# Altium PCB PCB1v2.PcbDoc
Units mil, origin at the board's own origin, x right, y up, seen from the top; angles counter-clockwise.
Board outline 1405 x 1775 mil, 2 copper layers (Top Layer, Bottom Layer); 27 components, 16 nets, 101 pads, 82 vias.
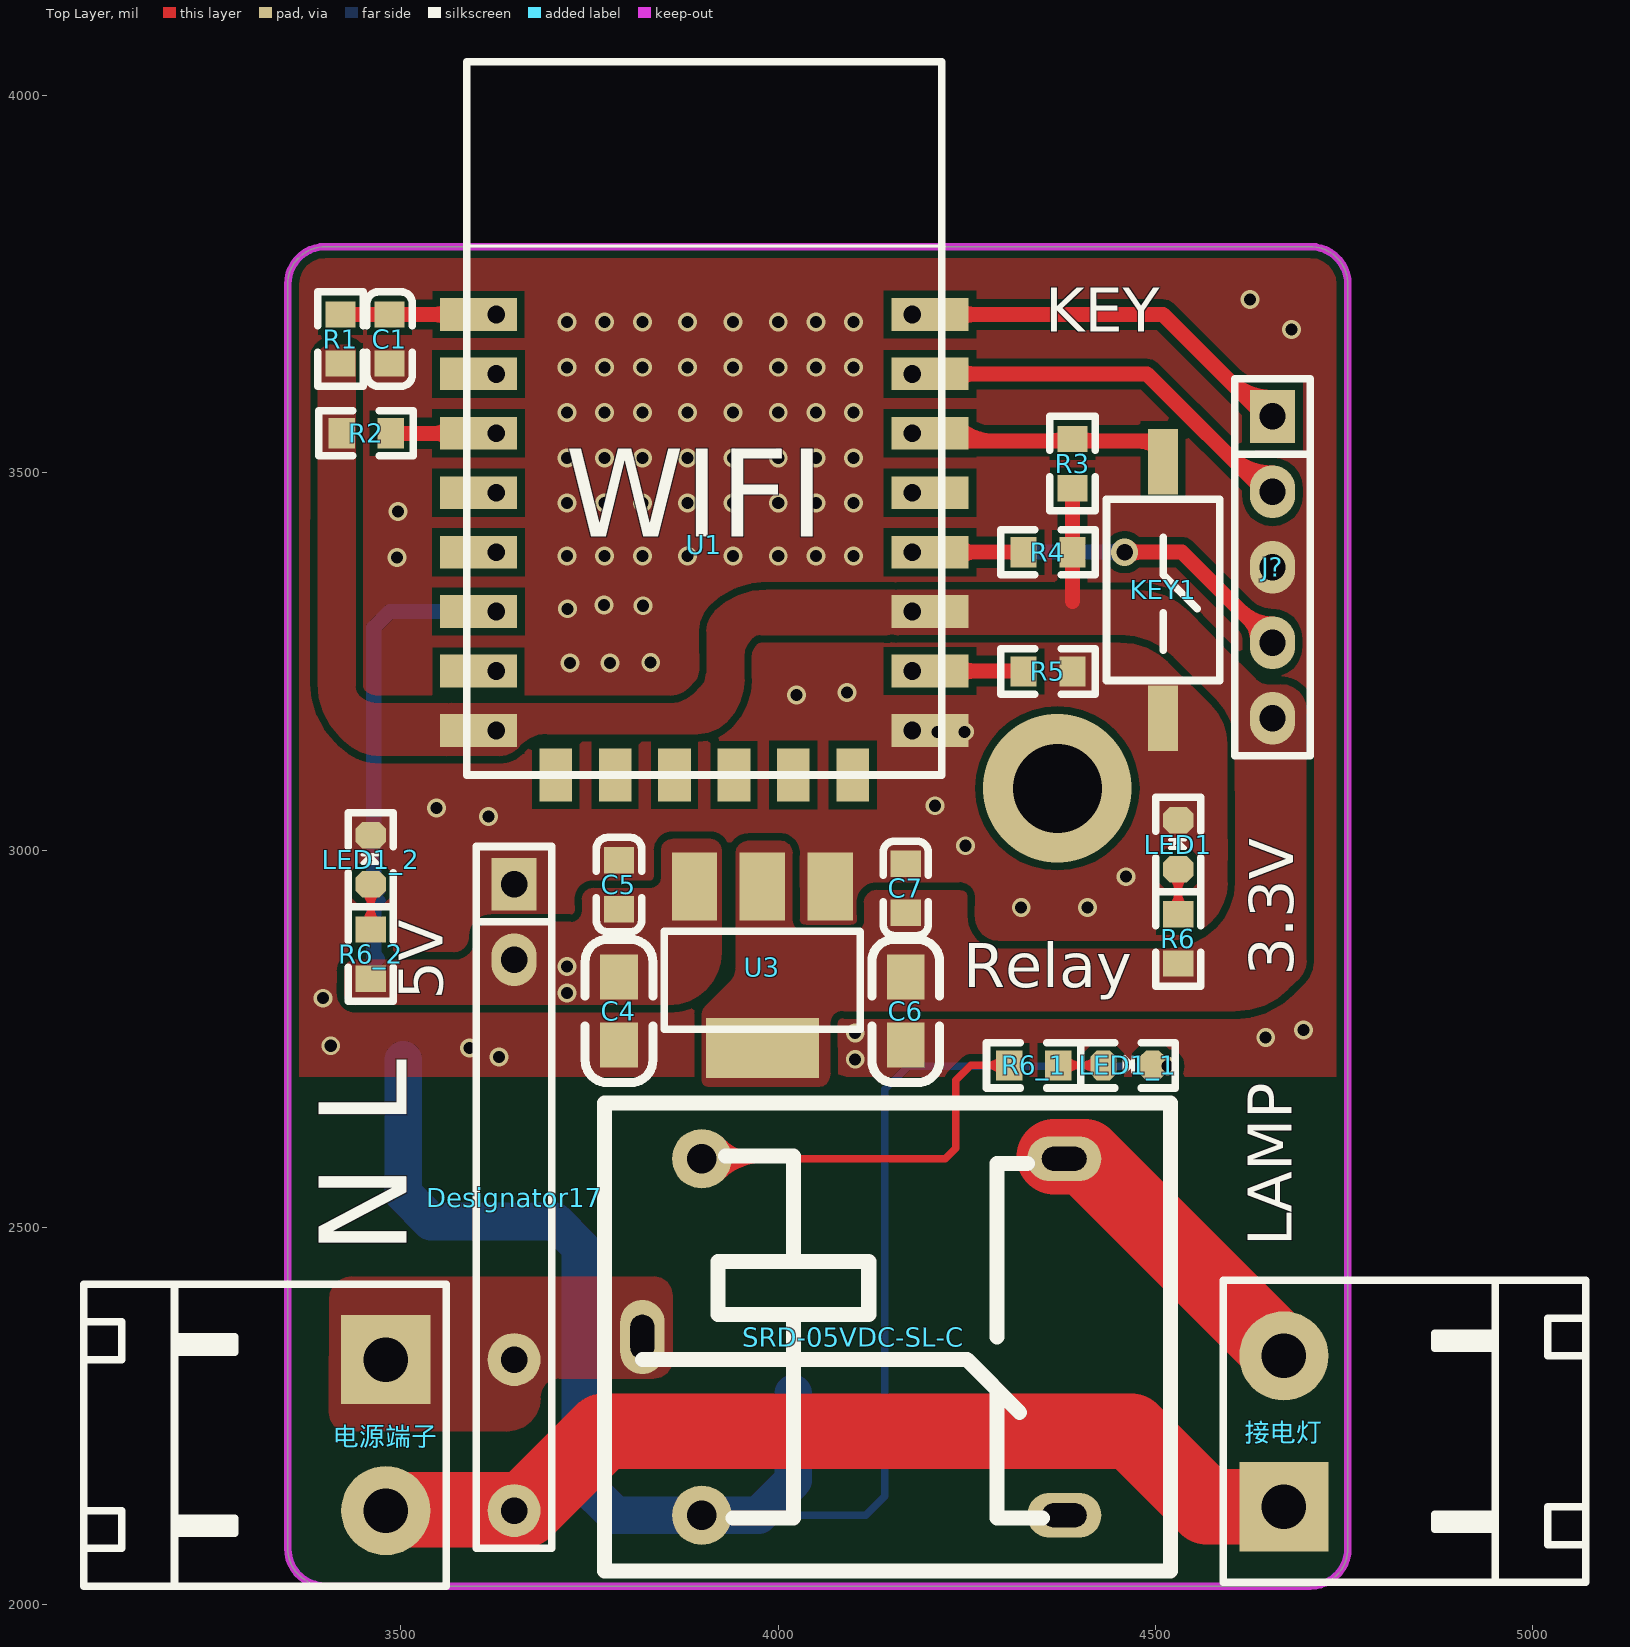
[diagram p0: Top Layer view]
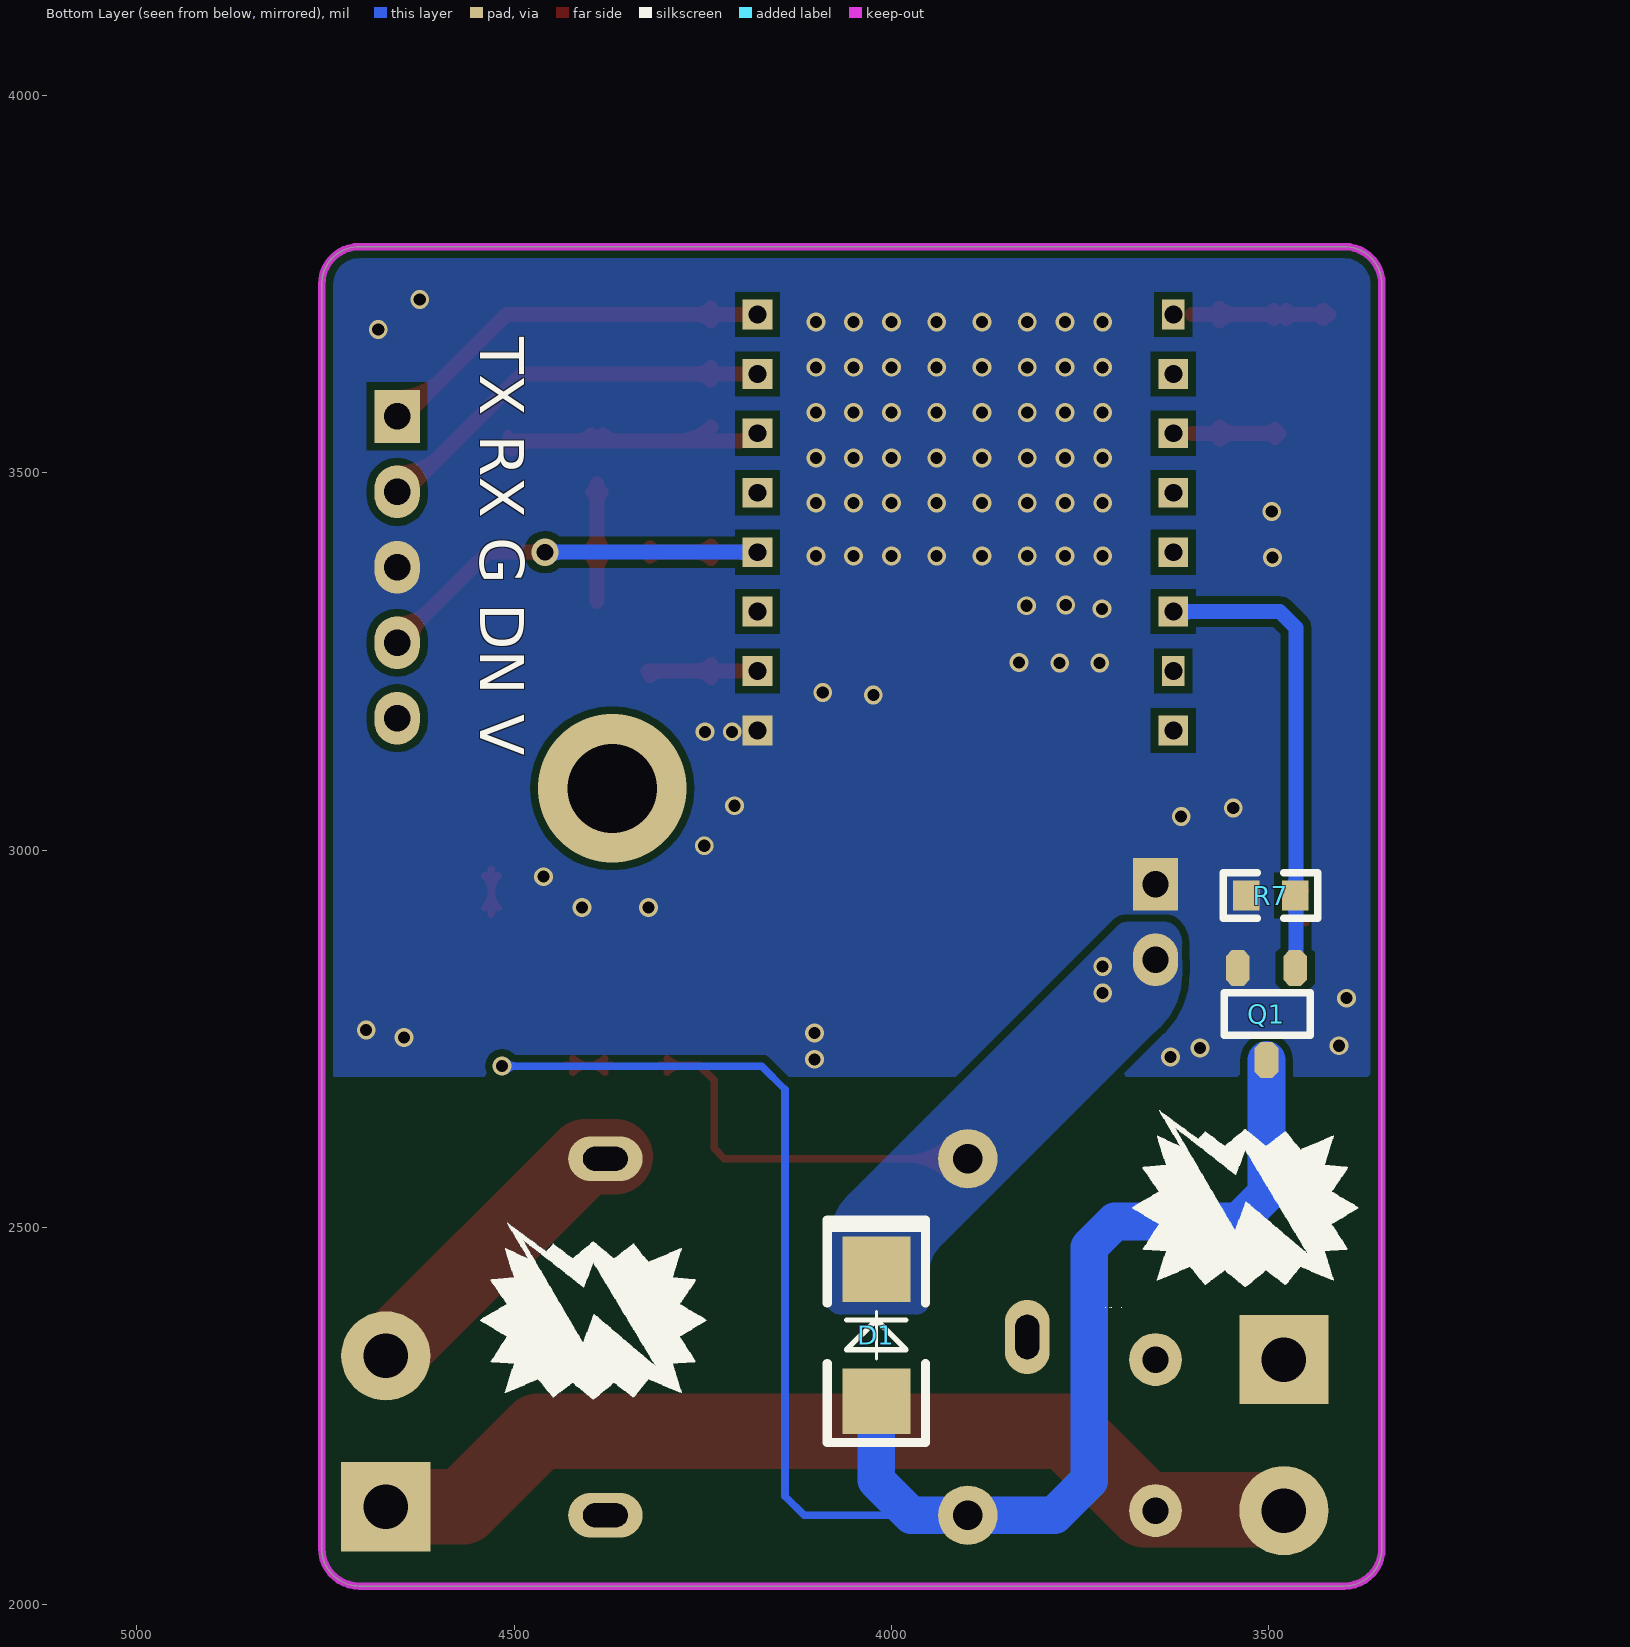
[diagram p1: Bottom Layer view, seen from below]

## Layer stack, top to bottom
Top Layer: signal copper 1.4
Dielectric: dielectric 12.6, FR-4, Dk 4.8
Bottom Layer: signal copper 1.4

## Board outline
3350,2075 ccw(c3400,2075) 3400,2025 4705,2025 ccw(c4705,2075) 4755,2075 4755,3750 ccw(c4705,3750) 4705,3800 3400,3800 ccw(c3400,3750) 3350,3750

## Design rules (kind name [scope] priority, off if disabled: settings)
Clearance [All] p1: gap=10
PlaneConnect [All] p1: planeconnectstyle=Direct reliefexpansion=20 reliefentries=4 reliefconductorwidth=10 reliefairgap=10
PolygonConnect [All] p1: connectstyle=Direct reliefconductorwidth=10 reliefentries=4 polygonreliefangle="90 Angle"
RoutingVias [All] p1: holewidth=28 width=50 viastyle="Through Hole" minholewidth=28 minwidth=50 maxholewidth=28 maxwidth=50
SilkscreenOverComponentPads [All] p1: minsilkscreentomaskgap=10
SolderMaskExpansion [All] p1: expansion=4
Width [All] p1: maxlimit=10 minlimit=10 preferedwidth=10
26 further rules are at their usual default settings.

## Components (designator, comment, footprint, x,y, rotation, side; value= is the part's Value field where it differs from the comment)
C1 "0.1U" 0603C 3485,3645 r90 top
C4 "1U" 0805C 3789,2742 r90 top
C5 "0.1U" 0603C 3789,2987 r270 top
C6 "1U" 0805C 4169,2742 r90 top
C7 "0.1U" 0603C 4169,2982 r270 top
D1 "SOD" 1411D 4020,2270 r90 bottom
Designator17 "Comment" ACDC 3650,2955 r0 top
J? "5P" SIP5 4655,3575 r0 top
KEY1 "KEY" KEY 4510,3515 r270 top
LED1 "LED" 0603D 4530,2975 r90 top
LED1_1 "LED" 0603D 4431,2715 r0 top (schematic designator LED1)
LED1_2 "LED" 0603D 3460,2955 r90 top (schematic designator LED1)
Q1 "NMOS" SOT-23-D 3465,2844 r0 bottom
R1 "10K" 0603R 3420,3710 r270 top
R2 "10K" 0603R 3486.38,3552.52 r180 top
R3 "10K" 0603R 4390,3480 r90 top
R4 "10K" 0603R 4390,3395 r180 top
R5 "10K" 0603R 4390,3237 r180 top
R6 "1K" 0603R 4530,2915 r270 top
R6_1 "1K" 0603R 4371,2715 r180 top (schematic designator R6)
R6_2 "1K" 0603R 3460,2895 r270 top (schematic designator R6)
R7 "10K" 0603R 3530,2940 r180 bottom
SRD-05VDC-SL-C "JIDIANQI" JDQ_S 3820,2355 r0 top
U1 "ESP8226-12F" ESP8226-12F 3626.38,3710 r0 top
U3 "AS1117-3.3V" SOT-223 4069,2952 r180 top
接电灯 "2P" KF2EDG5.08 4670,2130 r90 top
电源端子 "2P" KF2EDG5.08 3480,2325 r270 top

## Footprints (in the part's own frame and the unit in brackets; to place one, negate y for a bottom-side part, rotate by r counter-clockwise, add the part's x,y. Pads: shape width x height; smd on the part's side, far side on the other; paste and mask are expansions set on the pad)
0603C [mil]
  rect 35x40 smd: 1(0,0) 2(65,0)
  silkscreen extent -30,-30 95,30
0603D [mil]
  oct 35x40 smd: A(0,0) K(65,0)
  silkscreen extent -30,-30 95,30
0603R [mil]
  rect 35x40 smd: 1(0,0) 2(65,0)
  silkscreen extent -30,-30 95,30
0805C [mil]
  rect 60x50 smd: 1(0,0) 2(90,0)
  silkscreen extent -50,-45 140,45
1411D [mil]
  rect 86.61x90 smd: 1(0,0) 2(175,0)
  silkscreen extent -55,-65 240,65
ACDC [mil]
  rect 60x70 hole 35: 1(0,0)
  oval 60x70 hole 35: 2(0,-100)
  round 70 hole 35: 3(0,-630) 4(0,-830)
  silkscreen extent -50,-880 50,50
ESP8226-12F [mm]
  rect 2.6x1.1 smd: 1(-0.6,0) 2(-0.6,-2) 3(-0.6,-4) 4(-0.6,-6) 5(-0.6,-8) 6(-0.6,-10) 7(-0.6,-12) 8(-0.6,-14) 15(14.6,-14) 16(14.6,-12) 17(14.6,-10) 18(14.6,-8) 19(14.6,-6) 20(14.6,-4) 21(14.6,-2) 22(14.6,0)
  rect 0.762x1 hole 0.6: 1(0,0) 7(0,-12)
  rect 0.762x1 / inner rect 0.762x1 / far side rect 1x1 hole 0.6: 2(0,-2) 3(0,-4) 4(0,-6) 5(0,-8) 6(0,-10) 8(0,-14) 15(14,-14) 16(14,-12) 17(14,-10) 18(14,-8) 19(14,-6) 20(14,-4) 21(14,-2) 22(14,0)
  rect 1.1x1.8 smd: 9(2,-15.5) 10(4,-15.5) 11(6,-15.5) 12(8,-15.5) 13(10,-15.5) 14(12,-15.5)
  silkscreen extent -1,-15.5 15,8.5
JDQ_S [mm]
  round 2 hole 1: 1(2,6) 3(2,-6)
  oval 1.5x2.5 hole 0.8 slot 1.5 at 90 deg: 2(0,0)
  oval 2.5x1.5 hole 0.8 slot 1.5 at 0 deg: 4(14.2,6) 5(14.2,-6)
  silkscreen extent -1.27,-7.87 17.78,7.87
KEY [mm]
  rect 2.2x1 smd: 1(0,0) 2(8.636,0)
  silkscreen extent 1.27,-1.9 7.37,1.91
KF2EDG5.08 [mm]
  rect 3x3 hole 1.5: 1(0,0)
  round 3 hole 1.5: 2(5.08,0)
  silkscreen extent -2.54,-10.16 7.62,2.03
SIP5 [mil]
  rect 60x70 hole 35: 1(0,0)
  oval 60x70 hole 35: 2(0,-100) 3(0,-200) 4(0,-300) 5(0,-400)
  silkscreen extent -50,-450 50,50
SOT-23-D [mm]
  oct 0.8x1.2 smd: D(0.965,3.099) G(0,0) S(1.93,0)
  silkscreen extent -0.51,0.84 2.39,2.26
SOT-223 [mil]
  rect 150x80 smd: 0(90,214)
  rect 60x90 smd: 1(0,0) 2(90,0) 3(180,0)
  silkscreen extent -40,59 220,189

## Part data
C1 C4 C5 C6 C7: library part CAP1
R1 R2 R3 R4 R5 R6 R6_1 R6_2 R7: library part RES

## Via types
v1: diameter 25, hole 16, Top Layer to Bottom Layer, 80 vias
v2: diameter 36, hole 22, Top Layer to Bottom Layer, 1 vias
v3: diameter 196.85, hole 118.11, Top Layer to Bottom Layer, 1 vias

## Nets (pads, with @x,y where several pads share a name; then routed paths per layer and width w, separated by ;. In a path a pad name is that pad's centre, name@x,y a point inside that pad or via, vN(x,y) a via of type N, cw(c..) or ccw(c..) an arc to the next point about the centre after c; other vN are vias at no path point)
3.3V: C6.2 C7.2 J?.5 R1.2 R2.2 R3.1 R4.1 R6.2 U1.8 U1.17 U3.0 U3.2 | length 496.3
  Top Layer w20: 4390,3330 R3.1@4390,3485 ; R4.1@4384.7,3387.2 cw(c4371.89,3374.39) 4390,3374.39 ; R4.1@4384.7,3387.2 cw(c4371.89,3374.39) 4390,3374.39 ; R4.1@4384.7,3387.2 cw(c4371.89,3374.39) 4390,3374.39 ; R4.1@4384.7,3387.2 cw(c4371.89,3374.39) 4390,3374.39 ; R4.1@4384.7,3402.8 ccw(c4371.89,3415.61) 4390,3415.61 ; R4.1@4384.7,3402.8 ccw(c4371.89,3415.61) 4390,3415.61 ; R4.1@4384.7,3402.8 ccw(c4371.89,3415.61) 4390,3415.61 ; R4.1@4384.7,3402.8 ccw(c4371.89,3415.61) 4390,3415.61 ; R3.1@4384.7,3474.7 cw(c4371.89,3461.89) 4390,3461.89 ; R3.1@4384.7,3474.7 cw(c4371.89,3461.89) 4390,3461.89 ; R3.1@4384.7,3474.7 cw(c4371.89,3461.89) 4390,3461.89 ; R3.1@4384.7,3474.7 cw(c4371.89,3461.89) 4390,3461.89 ; 4390,3374.39 cw(c4408.11,3374.39) R4.1@4395.3,3387.2 ; 4390,3374.39 cw(c4408.11,3374.39) R4.1@4395.3,3387.2 ; 4390,3374.39 cw(c4408.11,3374.39) R4.1@4395.3,3387.2 ; 4390,3374.39 cw(c4408.11,3374.39) R4.1@4395.3,3387.2 ; 4390,3415.61 ccw(c4408.11,3415.61) R4.1@4395.3,3402.8 ; 4390,3415.61 ccw(c4408.11,3415.61) R4.1@4395.3,3402.8 ; 4390,3415.61 ccw(c4408.11,3415.61) R4.1@4395.3,3402.8 ; 4390,3415.61 ccw(c4408.11,3415.61) R4.1@4395.3,3402.8 ; 4390,3461.89 cw(c4408.11,3461.89) R3.1@4395.3,3474.7 ; 4390,3461.89 cw(c4408.11,3461.89) R3.1@4395.3,3474.7 ; 4390,3461.89 cw(c4408.11,3461.89) R3.1@4395.3,3474.7 ; 4390,3461.89 cw(c4408.11,3461.89) R3.1@4395.3,3474.7
5V: C4.2 C5.2 D1.2 Designator17.2 R6_1.2 R6_2.2 SRD-05VDC-SL-C.1 U3.3 | length 1591.9
  Top Layer w10: SRD-05VDC-SL-C.1 4221.22,2591.22 4235,2605 4235,2695 4255,2715 R6_1.2 ; SRD-05VDC-SL-C.1@3915.97,2573.99 cw(c3957.57,2532.39) 3957.57,2591.22 ; SRD-05VDC-SL-C.1@3915.97,2573.99 cw(c3957.57,2532.39) 3957.57,2591.22 ; SRD-05VDC-SL-C.1@3915.97,2573.99 cw(c3957.57,2532.39) 3957.57,2591.22 ; SRD-05VDC-SL-C.1@3915.97,2573.99 cw(c3957.57,2532.39) 3957.57,2591.22 ; SRD-05VDC-SL-C.1@3915.97,2608.45 ccw(c3957.57,2650.06) 3957.57,2591.22 ; SRD-05VDC-SL-C.1@3915.97,2608.45 ccw(c3957.57,2650.06) 3957.57,2591.22 ; SRD-05VDC-SL-C.1@3915.97,2608.45 ccw(c3957.57,2650.06) 3957.57,2591.22 ; SRD-05VDC-SL-C.1@3915.97,2608.45 ccw(c3957.57,2650.06) 3957.57,2591.22 ; SRD-05VDC-SL-C.1@3923.04,2566.92 cw(c3981.72,2508.24) 3981.72,2591.22 ; SRD-05VDC-SL-C.1@3923.04,2566.92 cw(c3981.72,2508.24) 3981.72,2591.22 ; SRD-05VDC-SL-C.1@3923.04,2566.92 cw(c3981.72,2508.24) 3981.72,2591.22 ; SRD-05VDC-SL-C.1@3923.04,2566.92 cw(c3981.72,2508.24) 3981.72,2591.22 ; SRD-05VDC-SL-C.1@3923.04,2615.52 ccw(c3981.72,2674.2) 3981.72,2591.22 ; SRD-05VDC-SL-C.1@3923.04,2615.52 ccw(c3981.72,2674.2) 3981.72,2591.22 ; SRD-05VDC-SL-C.1@3923.04,2615.52 ccw(c3981.72,2674.2) 3981.72,2591.22 ; SRD-05VDC-SL-C.1@3923.04,2615.52 ccw(c3981.72,2674.2) 3981.72,2591.22 ; 4275.82,2715 cw(c4275.82,2684.82) R6_1.2@4297.16,2706.16 ; 4275.82,2715 ccw(c4275.82,2745.18) R6_1.2@4297.16,2723.84 ; 4275.82,2715 cw(c4275.82,2684.82) R6_1.2@4297.16,2706.16 ; 4275.82,2715 ccw(c4275.82,2745.18) R6_1.2@4297.16,2723.84 ; 4275.82,2715 cw(c4275.82,2684.82) R6_1.2@4297.16,2706.16 ; 4275.82,2715 ccw(c4275.82,2745.18) R6_1.2@4297.16,2723.84 ; 4275.82,2715 cw(c4275.82,2684.82) R6_1.2@4297.16,2706.16 ; 4275.82,2715 ccw(c4275.82,2745.18) R6_1.2@4297.16,2723.84
  other v1: 3720,2811 3720,2846
DONLOD/NDONLOD: J?.4 R4.2 U1.18 | length 1561.4
  Top Layer w20: U1.18@4199.8,3395.04 R4.2 ; v2(4459,3395.04) 4534.96,3395.04 J?.4 ; U1.18@4238.95,3386.8 cw(c4258.84,3366.91) 4258.84,3395.04 ; U1.18@4238.95,3386.8 cw(c4258.84,3366.91) 4258.84,3395.04 ; U1.18@4238.95,3386.8 cw(c4258.84,3366.91) 4258.84,3395.04 ; U1.18@4238.95,3386.8 cw(c4258.84,3366.91) 4258.84,3395.04 ; U1.18@4238.95,3403.28 ccw(c4258.84,3423.17) 4258.84,3395.04 ; U1.18@4238.95,3403.28 ccw(c4258.84,3423.17) 4258.84,3395.04 ; U1.18@4238.95,3403.28 ccw(c4258.84,3423.17) 4258.84,3395.04 ; U1.18@4238.95,3403.28 ccw(c4258.84,3423.17) 4258.84,3395.04 ; 4306.8,3395.04 cw(c4306.8,3376.8) R4.2@4319.7,3389.7 ; 4306.8,3395.04 cw(c4306.8,3376.8) R4.2@4319.7,3389.7 ; 4306.8,3395.04 cw(c4306.8,3376.8) R4.2@4319.7,3389.7 ; 4306.8,3395.04 cw(c4306.8,3376.8) R4.2@4319.7,3389.7 ; 4306.99,3395.04 ccw(c4306.99,3413.01) R4.2@4319.7,3400.3 ; 4306.99,3395.04 ccw(c4306.99,3413.01) R4.2@4319.7,3400.3 ; 4306.99,3395.04 ccw(c4306.99,3413.01) R4.2@4319.7,3400.3 ; 4306.99,3395.04 ccw(c4306.99,3413.01) R4.2@4319.7,3400.3 ; v2@4464.66,3389.38 cw(c4478.31,3375.73) 4478.31,3395.04 ; v2@4464.66,3389.38 cw(c4478.31,3375.73) 4478.31,3395.04 ; v2@4464.66,3389.38 cw(c4478.31,3375.73) 4478.31,3395.04 ; v2@4464.66,3389.38 cw(c4478.31,3375.73) 4478.31,3395.04 ; v2@4464.66,3400.7 ccw(c4478.31,3414.35) 4478.31,3395.04 ; v2@4464.66,3400.7 ccw(c4478.31,3414.35) 4478.31,3395.04 ; v2@4464.66,3400.7 ccw(c4478.31,3414.35) 4478.31,3395.04 ; v2@4464.66,3400.7 ccw(c4478.31,3414.35) 4478.31,3395.04 ; 4612.32,3317.68 ccw(c4655,3360.36) J?.4@4655,3300 ; 4612.32,3317.68 ccw(c4655,3360.36) J?.4@4655,3300 ; 4612.32,3317.68 ccw(c4655,3360.36) J?.4@4655,3300 ; 4624.39,3305.61 cw(c4598.79,3280) J?.4@4635,3280 ; 4624.39,3305.61 cw(c4598.79,3280) J?.4@4635,3280 ; 4624.39,3305.61 cw(c4598.79,3280) J?.4@4635,3280
  Bottom Layer w20: U1.18@4176.18,3395.04 v2(4459,3395.04) ; U1.18@4184.41,3388.19 cw(c4200.94,3371.66) 4200.94,3395.04 ; U1.18@4184.41,3388.19 cw(c4200.94,3371.66) 4200.94,3395.04 ; U1.18@4184.41,3388.19 cw(c4200.94,3371.66) 4200.94,3395.04 ; U1.18@4184.41,3388.19 cw(c4200.94,3371.66) 4200.94,3395.04 ; U1.18@4184.41,3401.89 ccw(c4200.94,3418.42) 4200.94,3395.04 ; U1.18@4184.41,3401.89 ccw(c4200.94,3418.42) 4200.94,3395.04 ; U1.18@4184.41,3401.89 ccw(c4200.94,3418.42) 4200.94,3395.04 ; U1.18@4184.41,3401.89 ccw(c4200.94,3418.42) 4200.94,3395.04 ; 4439.69,3395.04 cw(c4439.69,3375.73) v2@4453.34,3389.38 ; 4439.69,3395.04 ccw(c4439.69,3414.35) v2@4453.34,3400.7 ; 4439.69,3395.04 cw(c4439.69,3375.73) v2@4453.34,3389.38 ; 4439.69,3395.04 ccw(c4439.69,3414.35) v2@4453.34,3400.7 ; 4439.69,3395.04 cw(c4439.69,3375.73) v2@4453.34,3389.38 ; 4439.69,3395.04 ccw(c4439.69,3414.35) v2@4453.34,3400.7 ; 4439.69,3395.04 cw(c4439.69,3375.73) v2@4453.34,3389.38 ; 4439.69,3395.04 ccw(c4439.69,3414.35) v2@4453.34,3400.7
GND: C1.1 C4.1 C5.1 C6.1 C7.1 Designator17.1 J?.3 KEY1.2 LED1.K LED1_2.K Q1.S R5.1 R7.1 U1.15 U3.1
  other v1: 4102,2723 3630,2726 3591,2738 3407,2741 4646,2752 4102,2758 4696,2762 3397,2804 4322,2924 4410,2924 4461,2965 4248,3006 3616,3045 3547,3056 4208,3059 4211,3157 4247,3157 4024,3206 4091,3209 3724,3248 3777,3248 3831,3249 3721,3320 3821,3324 3769,3325 3495,3388 3720,3390 3770,3390 3820,3390 3880,3390 3940,3390 4000,3390 4050,3390 4100,3390 3496,3449 3720,3460 3770,3460 3820,3460 3880,3460 3940,3460 4000,3460 4050,3460 4100,3460 3720,3520 3770,3520 3820,3520 3880,3520 3940,3520 4000,3520 4050,3520 4100,3520 3720,3580 3770,3580 3820,3580 3880,3580 3940,3580 4000,3580 4050,3580 4100,3580 3720,3640 3770,3640 3820,3640 3880,3640 3940,3640 4000,3640 4050,3640 4100,3640 4680,3690 3720,3700 3770,3700 3820,3700 3880,3700 3940,3700 4000,3700 4050,3700 4100,3700 4625,3730
KEY: KEY1.1 R3.2 U1.20 | length 884.1
  Top Layer w10: KEY1.1@4507.48,3552.52 KEY1.1@4510,3550
  Top Layer w20: U1.20@4199.8,3542.52 KEY1.1@4507.48,3542.52 ; U1.20@4181.09,3551.37 ccw(c4202.46,3572.74) U1.20@4202.46,3542.52 ; U1.20@4181.09,3551.37 ccw(c4202.46,3572.74) U1.20@4202.46,3542.52 ; U1.20@4181.09,3551.37 ccw(c4202.46,3572.74) U1.20@4202.46,3542.52 ; U1.20@4181.09,3551.37 ccw(c4202.46,3572.74) U1.20@4202.46,3542.52 ; U1.20@4238.95,3560.76 ccw(c4282.98,3604.8) 4282.98,3542.52 ; U1.20@4238.95,3560.76 ccw(c4282.98,3604.8) 4282.98,3542.52 ; U1.20@4238.95,3560.76 ccw(c4282.98,3604.8) 4282.98,3542.52 ; U1.20@4238.95,3560.76 ccw(c4282.98,3604.8) 4282.98,3542.52 ; 4363.41,3542.52 ccw(c4363.41,3569.09) R3.2@4382.2,3550.3 ; 4363.41,3542.52 ccw(c4363.41,3569.09) R3.2@4382.2,3550.3 ; 4363.41,3542.52 ccw(c4363.41,3569.09) R3.2@4382.2,3550.3 ; 4363.41,3542.52 ccw(c4363.41,3569.09) R3.2@4382.2,3550.3 ; R3.2@4397.8,3550.3 ccw(c4416.59,3569.09) 4416.59,3542.52 ; R3.2@4397.8,3550.3 ccw(c4416.59,3569.09) 4416.59,3542.52 ; R3.2@4397.8,3550.3 ccw(c4416.59,3569.09) 4416.59,3542.52 ; R3.2@4397.8,3550.3 ccw(c4416.59,3569.09) 4416.59,3542.52 ; 4477.21,3542.52 cw(c4477.21,3505.83) KEY1.1@4503.15,3531.77 ; 4477.21,3542.52 cw(c4477.21,3505.83) KEY1.1@4503.15,3531.77 ; 4477.21,3542.52 cw(c4477.21,3505.83) KEY1.1@4503.15,3531.77 ; 4477.21,3542.52 cw(c4477.21,3505.83) KEY1.1@4503.15,3531.77
NetC1_2: C1.2 R1.1 U1.1 | length 699.4
  Top Layer w20: R1.1 U1.1@3601.38,3710 ; R1.1@3427.8,3704.7 cw(c3440.61,3691.89) 3440.61,3710 ; R1.1@3427.8,3704.7 cw(c3440.61,3691.89) 3440.61,3710 ; R1.1@3427.8,3704.7 cw(c3440.61,3691.89) 3440.61,3710 ; R1.1@3427.8,3704.7 cw(c3440.61,3691.89) 3440.61,3710 ; R1.1@3427.8,3715.3 ccw(c3440.61,3728.11) 3440.61,3710 ; R1.1@3427.8,3715.3 ccw(c3440.61,3728.11) 3440.61,3710 ; R1.1@3427.8,3715.3 ccw(c3440.61,3728.11) 3440.61,3710 ; R1.1@3427.8,3715.3 ccw(c3440.61,3728.11) 3440.61,3710 ; 3464.39,3710 cw(c3464.39,3691.89) C1.2@3477.2,3704.7 ; 3464.39,3710 ccw(c3464.39,3728.11) C1.2@3477.2,3715.3 ; 3464.39,3710 cw(c3464.39,3691.89) C1.2@3477.2,3704.7 ; 3464.39,3710 ccw(c3464.39,3728.11) C1.2@3477.2,3715.3 ; 3464.39,3710 cw(c3464.39,3691.89) C1.2@3477.2,3704.7 ; 3464.39,3710 ccw(c3464.39,3728.11) C1.2@3477.2,3715.3 ; 3464.39,3710 cw(c3464.39,3691.89) C1.2@3477.2,3704.7 ; 3464.39,3710 ccw(c3464.39,3728.11) C1.2@3477.2,3715.3 ; C1.2@3492.8,3704.7 cw(c3505.61,3691.89) 3505.61,3710 ; C1.2@3492.8,3704.7 cw(c3505.61,3691.89) 3505.61,3710 ; C1.2@3492.8,3704.7 cw(c3505.61,3691.89) 3505.61,3710 ; C1.2@3492.8,3704.7 cw(c3505.61,3691.89) 3505.61,3710 ; C1.2@3492.8,3715.3 ccw(c3505.61,3728.11) 3505.61,3710 ; C1.2@3492.8,3715.3 ccw(c3505.61,3728.11) 3505.61,3710 ; C1.2@3492.8,3715.3 ccw(c3505.61,3728.11) 3505.61,3710 ; C1.2@3492.8,3715.3 ccw(c3505.61,3728.11) 3505.61,3710 ; 3545.09,3710 cw(c3545.09,3681.87) U1.1@3564.99,3701.76 ; 3545.09,3710 ccw(c3545.09,3738.13) U1.1@3564.99,3718.24 ; 3545.09,3710 cw(c3545.09,3681.87) U1.1@3564.99,3701.76 ; 3545.09,3710 ccw(c3545.09,3738.13) U1.1@3564.99,3718.24 ; 3545.09,3710 cw(c3545.09,3681.87) U1.1@3564.99,3701.76 ; 3545.09,3710 ccw(c3545.09,3738.13) U1.1@3564.99,3718.24 ; 3545.09,3710 cw(c3545.09,3681.87) U1.1@3564.99,3701.76 ; 3545.09,3710 ccw(c3545.09,3738.13) U1.1@3564.99,3718.24
NetD1_1: D1.1 LED1_1.K Q1.D SRD-05VDC-SL-C.3 | length 2681.7
  Bottom Layer w10: 3973.74,2118.78 4115.78,2118.78 4141,2144 4141,2683 4172,2714 v1(4516,2714) ; 4497.89,2714 cw(c4497.89,2695.89) v1@4510.7,2708.7 ; 4497.89,2714 ccw(c4497.89,2732.11) v1@4510.7,2719.3 ; 4497.89,2714 cw(c4497.89,2695.89) v1@4510.7,2708.7 ; 4497.89,2714 ccw(c4497.89,2732.11) v1@4510.7,2719.3 ; 4497.89,2714 cw(c4497.89,2695.89) v1@4510.7,2708.7 ; 4497.89,2714 ccw(c4497.89,2732.11) v1@4510.7,2719.3 ; 4497.89,2714 cw(c4497.89,2695.89) v1@4510.7,2708.7 ; 4497.89,2714 ccw(c4497.89,2732.11) v1@4510.7,2719.3
  Bottom Layer w50: Q1.D 3503,2545 3540,2508 3704,2508 3738,2474 3738,2165 3784,2119 3786,2119 3786.22,2118.78 3973.74,2118.78 4020,2165.04 D1.1@4020,2280 ; D1.1@4007.05,2257.05 cw(c3975.8,2225.8) 4020,2225.8 ; D1.1@4007.05,2257.05 cw(c3975.8,2225.8) 4020,2225.8 ; D1.1@4007.05,2257.05 cw(c3975.8,2225.8) 4020,2225.8 ; D1.1@4007.05,2257.05 cw(c3975.8,2225.8) 4020,2225.8 ; 4020,2225.8 cw(c4064.2,2225.8) D1.1@4032.95,2257.05 ; 4020,2225.8 cw(c4064.2,2225.8) D1.1@4032.95,2257.05 ; 4020,2225.8 cw(c4064.2,2225.8) D1.1@4032.95,2257.05 ; 4020,2225.8 cw(c4064.2,2225.8) D1.1@4032.95,2257.05
NetLED1_A: 
NetR2_1: R2.1 U1.3 | length 405.5
  Top Layer w20: R2.1 U1.3@3601.38,3552.52 ; R2.1@3491.68,3547.22 cw(c3504.48,3534.41) 3504.48,3552.52 ; R2.1@3491.68,3547.22 cw(c3504.48,3534.41) 3504.48,3552.52 ; R2.1@3491.68,3547.22 cw(c3504.48,3534.41) 3504.48,3552.52 ; R2.1@3491.68,3547.22 cw(c3504.48,3534.41) 3504.48,3552.52 ; R2.1@3491.68,3557.82 ccw(c3504.48,3570.63) 3504.48,3552.52 ; R2.1@3491.68,3557.82 ccw(c3504.48,3570.63) 3504.48,3552.52 ; R2.1@3491.68,3557.82 ccw(c3504.48,3570.63) 3504.48,3552.52 ; R2.1@3491.68,3557.82 ccw(c3504.48,3570.63) 3504.48,3552.52 ; 3545.09,3552.52 cw(c3545.09,3524.39) U1.3@3564.99,3544.28 ; 3545.09,3552.52 ccw(c3545.09,3580.65) U1.3@3564.99,3560.76 ; 3545.09,3552.52 cw(c3545.09,3524.39) U1.3@3564.99,3544.28 ; 3545.09,3552.52 ccw(c3545.09,3580.65) U1.3@3564.99,3560.76 ; 3545.09,3552.52 cw(c3545.09,3524.39) U1.3@3564.99,3544.28 ; 3545.09,3552.52 ccw(c3545.09,3580.65) U1.3@3564.99,3560.76 ; 3545.09,3552.52 cw(c3545.09,3524.39) U1.3@3564.99,3544.28 ; 3545.09,3552.52 ccw(c3545.09,3580.65) U1.3@3564.99,3560.76
NetR5_2: R5.2 U1.16 | length 360.9
  Top Layer w20: U1.16@4201.18,3237.56 R5.2@4322.44,3237.56 ; U1.16@4238.95,3229.32 cw(c4258.84,3209.42) 4258.84,3237.56 ; U1.16@4238.95,3229.32 cw(c4258.84,3209.42) 4258.84,3237.56 ; U1.16@4238.95,3229.32 cw(c4258.84,3209.42) 4258.84,3237.56 ; U1.16@4238.95,3229.32 cw(c4258.84,3209.42) 4258.84,3237.56 ; U1.16@4238.95,3245.8 ccw(c4258.84,3265.69) 4258.84,3237.56 ; U1.16@4238.95,3245.8 ccw(c4258.84,3265.69) 4258.84,3237.56 ; U1.16@4238.95,3245.8 ccw(c4258.84,3265.69) 4258.84,3237.56 ; U1.16@4238.95,3245.8 ccw(c4258.84,3265.69) 4258.84,3237.56 ; 4305.54,3237.56 cw(c4305.54,3217.54) R5.2@4319.7,3231.7 ; 4305.54,3237.56 cw(c4305.54,3217.54) R5.2@4319.7,3231.7 ; 4305.54,3237.56 cw(c4305.54,3217.54) R5.2@4319.7,3231.7 ; 4305.54,3237.56 cw(c4305.54,3217.54) R5.2@4319.7,3231.7
NetSRD-05VDC-SL-C_4: SRD-05VDC-SL-C.4 接电灯.2 | length 413.4
  Top Layer w100: SRD-05VDC-SL-C.4@4366,2594 4406,2594 接电灯.2
RX: J?.2 U1.21 | length 959.2
  Top Layer w20: U1.21@4199.8,3631.26 4488.74,3631.26 J?.2@4650,3470 ; U1.21@4238.95,3623.02 cw(c4258.84,3603.13) 4258.84,3631.26 ; U1.21@4238.95,3623.02 cw(c4258.84,3603.13) 4258.84,3631.26 ; U1.21@4238.95,3623.02 cw(c4258.84,3603.13) 4258.84,3631.26 ; U1.21@4238.95,3623.02 cw(c4258.84,3603.13) 4258.84,3631.26 ; U1.21@4238.95,3639.5 ccw(c4258.84,3659.39) 4258.84,3631.26 ; U1.21@4238.95,3639.5 ccw(c4258.84,3659.39) 4258.84,3631.26 ; U1.21@4238.95,3639.5 ccw(c4258.84,3659.39) 4258.84,3631.26 ; U1.21@4238.95,3639.5 ccw(c4258.84,3659.39) 4258.84,3631.26 ; 4595.25,3524.75 ccw(c4655,3584.5) J?.2@4655,3500 ; 4595.25,3524.75 ccw(c4655,3584.5) J?.2@4655,3500 ; 4595.25,3524.75 ccw(c4655,3584.5) J?.2@4655,3500 ; 4595.25,3524.75 ccw(c4655,3584.5) J?.2@4655,3500
SWITCH: Q1.G R7.2 U1.6 | length 958.7
  Bottom Layer w20: Q1.G@3464,2844 3464,3295 3485.3,3316.3 U1.6@3626.38,3316.3 ; 3464,2868.17 ccw(c3481.29,2868.17) Q1.G@3469.06,2855.94 ; 3464,2868.17 ccw(c3481.29,2868.17) Q1.G@3469.06,2855.94 ; 3464,2868.17 ccw(c3481.29,2868.17) Q1.G@3469.06,2855.94 ; 3464,2868.17 ccw(c3481.29,2868.17) Q1.G@3469.06,2855.94 ; 3464,2916.98 cw(c3485.52,2916.98) R7.2@3470.3,2932.2 ; 3464,2916.98 cw(c3485.52,2916.98) R7.2@3470.3,2932.2 ; 3464,2916.98 cw(c3485.52,2916.98) R7.2@3470.3,2932.2 ; 3464,2916.98 cw(c3485.52,2916.98) R7.2@3470.3,2932.2 ; 3464,2963.02 ccw(c3485.52,2963.02) R7.2@3470.3,2947.8 ; 3464,2963.02 ccw(c3485.52,2963.02) R7.2@3470.3,2947.8 ; 3464,2963.02 ccw(c3485.52,2963.02) R7.2@3470.3,2947.8 ; 3464,2963.02 ccw(c3485.52,2963.02) R7.2@3470.3,2947.8 ; 3603,3316.3 cw(c3603,3292.92) U1.6@3619.53,3309.45 ; 3603,3316.3 ccw(c3603,3339.68) U1.6@3619.53,3323.15 ; 3603,3316.3 cw(c3603,3292.92) U1.6@3619.53,3309.45 ; 3603,3316.3 ccw(c3603,3339.68) U1.6@3619.53,3323.15 ; 3603,3316.3 cw(c3603,3292.92) U1.6@3619.53,3309.45 ; 3603,3316.3 ccw(c3603,3339.68) U1.6@3619.53,3323.15 ; 3603,3316.3 cw(c3603,3292.92) U1.6@3619.53,3309.45 ; 3603,3316.3 ccw(c3603,3339.68) U1.6@3619.53,3323.15
TX: J?.1 U1.22 | length 957.5
  Top Layer w20: U1.22@4199.8,3710 4510,3710 J?.1@4655,3565 ; U1.22@4238.95,3701.76 cw(c4258.84,3681.87) 4258.84,3710 ; U1.22@4238.95,3701.76 cw(c4258.84,3681.87) 4258.84,3710 ; U1.22@4238.95,3701.76 cw(c4258.84,3681.87) 4258.84,3710 ; U1.22@4238.95,3701.76 cw(c4258.84,3681.87) 4258.84,3710 ; U1.22@4238.95,3718.24 ccw(c4258.84,3738.13) 4258.84,3710 ; U1.22@4238.95,3718.24 ccw(c4258.84,3738.13) 4258.84,3710 ; U1.22@4238.95,3718.24 ccw(c4258.84,3738.13) 4258.84,3710 ; U1.22@4238.95,3718.24 ccw(c4258.84,3738.13) 4258.84,3710 ; 4595.25,3624.75 ccw(c4655,3684.5) J?.1@4655,3600 ; 4595.25,3624.75 ccw(c4655,3684.5) J?.1@4655,3600 ; 4595.25,3624.75 ccw(c4655,3684.5) J?.1@4655,3600 ; 4595.25,3624.75 ccw(c4655,3684.5) J?.1@4655,3600
火线: Designator17.3 SRD-05VDC-SL-C.2 电源端子.1
零线: Designator17.4 接电灯.1 电源端子.2 | length 1281.5
  Top Layer w100: 电源端子.2@3473,2126 3664,2126 3768,2230 4468,2230 4568,2130 接电灯.1
pads on no net: LED1.A LED1_1.A LED1_2.A R6.1 R6_1.1 R6_2.1 SRD-05VDC-SL-C.5 U1.2 U1.4 U1.5 U1.7 U1.9 U1.10 U1.11 U1.12 U1.13 U1.14 U1.19
copper on no net: | length 1317.7
  Top Layer w10: 3460,2895 3460,2955 ; 4371,2715 4431,2715 ; 4530,2915 4530,2975 ; 3451.16,2903.84 ccw(c3429.82,2925.18) 3460,2925.18 ; 3451.16,2903.84 ccw(c3429.82,2925.18) 3460,2925.18 ; 3451.16,2903.84 ccw(c3429.82,2925.18) 3460,2925.18 ; 3451.16,2903.84 ccw(c3429.82,2925.18) 3460,2925.18 ; 3451.16,2946.16 cw(c3429.82,2924.82) 3460,2924.82 ; 3451.16,2946.16 cw(c3429.82,2924.82) 3460,2924.82 ; 3451.16,2946.16 cw(c3429.82,2924.82) 3460,2924.82 ; 3451.16,2946.16 cw(c3429.82,2924.82) 3460,2924.82 ; 3460,2924.82 cw(c3490.18,2924.82) 3468.84,2946.16 ; 3460,2924.82 cw(c3490.18,2924.82) 3468.84,2946.16 ; 3460,2924.82 cw(c3490.18,2924.82) 3468.84,2946.16 ; 3460,2924.82 cw(c3490.18,2924.82) 3468.84,2946.16 ; 3460,2925.18 ccw(c3490.18,2925.18) 3468.84,2903.84 ; 3460,2925.18 ccw(c3490.18,2925.18) 3468.84,2903.84 ; 3460,2925.18 ccw(c3490.18,2925.18) 3468.84,2903.84 ; 3460,2925.18 ccw(c3490.18,2925.18) 3468.84,2903.84 ; 4379.84,2706.16 cw(c4401.18,2684.82) 4401.18,2715 ; 4379.84,2706.16 cw(c4401.18,2684.82) 4401.18,2715 ; 4379.84,2706.16 cw(c4401.18,2684.82) 4401.18,2715 ; 4379.84,2706.16 cw(c4401.18,2684.82) 4401.18,2715 ; 4379.84,2723.84 ccw(c4401.18,2745.18) 4401.18,2715 ; 4379.84,2723.84 ccw(c4401.18,2745.18) 4401.18,2715 ; 4379.84,2723.84 ccw(c4401.18,2745.18) 4401.18,2715 ; 4379.84,2723.84 ccw(c4401.18,2745.18) 4401.18,2715 ; 4400.82,2715 cw(c4400.82,2684.82) 4422.16,2706.16 ; 4400.82,2715 ccw(c4400.82,2745.18) 4422.16,2723.84 ; 4400.82,2715 cw(c4400.82,2684.82) 4422.16,2706.16 ; 4400.82,2715 ccw(c4400.82,2745.18) 4422.16,2723.84 ; 4400.82,2715 cw(c4400.82,2684.82) 4422.16,2706.16 ; 4400.82,2715 ccw(c4400.82,2745.18) 4422.16,2723.84 ; 4400.82,2715 cw(c4400.82,2684.82) 4422.16,2706.16 ; 4400.82,2715 ccw(c4400.82,2745.18) 4422.16,2723.84 ; 4521.16,2923.84 ccw(c4499.82,2945.18) 4530,2945.18 ; 4521.16,2923.84 ccw(c4499.82,2945.18) 4530,2945.18 ; 4521.16,2923.84 ccw(c4499.82,2945.18) 4530,2945.18 ; 4521.16,2923.84 ccw(c4499.82,2945.18) 4530,2945.18 ; 4521.16,2966.16 cw(c4499.82,2944.82) 4530,2944.82 ; 4521.16,2966.16 cw(c4499.82,2944.82) 4530,2944.82 ; 4521.16,2966.16 cw(c4499.82,2944.82) 4530,2944.82 ; 4521.16,2966.16 cw(c4499.82,2944.82) 4530,2944.82 ; 4530,2944.82 cw(c4560.18,2944.82) 4538.84,2966.16 ; 4530,2944.82 cw(c4560.18,2944.82) 4538.84,2966.16 ; 4530,2944.82 cw(c4560.18,2944.82) 4538.84,2966.16 ; 4530,2944.82 cw(c4560.18,2944.82) 4538.84,2966.16 ; 4530,2945.18 ccw(c4560.18,2945.18) 4538.84,2923.84 ; 4530,2945.18 ccw(c4560.18,2945.18) 4538.84,2923.84 ; 4530,2945.18 ccw(c4560.18,2945.18) 4538.84,2923.84 ; 4530,2945.18 ccw(c4560.18,2945.18) 4538.84,2923.84
  other v3: 4370,3082

## Polygon pours and split planes (outlines as drawn)
GND on Top Layer "Top Layer-No Net" (solid, remove dead copper): 3340,3800 4760,3800 4760,2700 3340,2700 3340,3800
火线 on Top Layer "Top Layer-No Net" (solid, remove dead copper): 3860,2300 3860,2410 ccw(c3835,2410) 3835,2435 3745,2435 3435,2435 ccw(c3435,2405) 3405,2405 3405,2255 ccw(c3430,2255) 3430,2230 3640,2230 ccw(c3640,2275) 3685,2275 cw(c3710,2275) 3710,2300 3835,2300 ccw(c3835,2325) 3860,2325
5V on Top Layer "Top Layer-No Net" (solid, remove dead copper): 3925,2990 3925,3000 ccw(c3910,3000) 3910,3015 3860,3015 ccw(c3860,3000) 3845,3000 3845,2965 cw(c3830,2965) 3830,2950 3755,2950 ccw(c3755,2935) 3740,2935 3740,2920 cw(c3725,2920) 3725,2905 3620,2905 ccw(c3620,2885) 3600,2885 cw(c3570,2885) 3570,2855 3440,2855 ccw(c3440,2840) 3425,2840 3425,2810 ccw(c3440,2810) 3440,2795 3840,2795 3855,2795 ccw(c3855,2865) 3925,2865 3925,2990
3.3V on Top Layer "Top Layer-No Net" (solid, remove dead copper): 3567.07,3195.33 cw(c3566.26,3196.14) 3566.26,3195 3475,3195 3469.14,3195 cw(c3469.14,3229.14) 3445,3205 cw(c3457.07,3217.07) 3440,3217.07 3440,3240 3440,3665 3438.54,3666.46 ccw(c3430,3657.93) 3430,3670 3407.07,3670 ccw(c3407.07,3652.93) 3395,3665 3393.54,3663.54 ccw(c3402.07,3655) 3390,3655 3390,3221.42 ccw(c3490,3221.42) 3419.29,3150.71 3425,3145 ccw(c3473.28,3193.28) 3473.28,3125 3565,3125 3565,3194.06 cw(c3566.33,3194.06) 3565.39,3195
3.3V on Top Layer "Top Layer-No Net" (solid, remove dead copper): 4155.39,3345 3984.41,3345 ccw(c3984.41,3248.36) 3916.08,3316.69 ccw(c3942.82,3289.95) 3905,3289.95 3905,3284.56 3905,3236.03 cw(c3900.5,3236.03) 3903.68,3232.84 cw(c3881.4,3232.84) 3897.16,3217.09 3887.91,3207.84 cw(c3856.9,3238.85) 3856.9,3195 3853.79,3195 3567.07,3195 ccw(c3567.07,3177.93) 3555,3190 3550.73,3185.73 ccw(c3565.01,3171.45) 3544.82,3171.45 3544.82,3142.43 cw(c3544.3,3142.43) 3544.67,3142.07 ccw(c3562.07,3142.07) 3549.76,3129.76 ccw(c3561.26,3141.26) 3561.26,3125 3565,3125 3630,3125 ccw(c3630,3161.21) 3655.61,3135.61 3660,3140 cw(c3693.96,3106.04) 3693.96,3154.07 3695.55,3154.07 3893.23,3154.07 ccw(c3893.23,3208.46) 3931.69,3170 ccw(c3875.42,3226.27) 3955,3226.27 3955,3255 3955,3255.86 cw(c3989.14,3255.86) 3965,3280 cw(c3977.07,3267.93) 3977.07,3285 4140,3285 4144.34,3285 ccw(c4144.34,3301.85) 4156.26,3289.94 ccw(c4154.29,3291.9) 4157.07,3291.9 4157.07,3343.89
3.3V on Top Layer "Top Layer-No Net" (solid, remove dead copper, pour order 1001): 4086.88,2786.91 4605.48,2786.91 ccw(c4605.48,2886.91) 4676.2,2816.2 4690,2830 ccw(c4665.86,2854.14) 4700,2854.14 4700,2875 4700,3175 4700,3185.86 ccw(c4665.86,3185.86) 4690,3210 ccw(c4665.86,3185.86) 4665.86,3220 4650,3220 cw(c4650,3244.14) 4632.93,3227.07 4590,3270 4544.29,3315.71 ccw(c4473.58,3245) 4473.58,3345 4440,3345 4157.07,3345 ccw(c4157.07,3327.93) 4145,3340 4143.54,3338.54 ccw(c4152.07,3330) 4140,3330 4140,3302.07 ccw(c4157.07,3302.07) 4145,3290 ccw(c4157.07,3302.07) 4157.07,3285 4160,3285 4453.58,3285 cw(c4453.58,3185) 4524.29,3255.71 4530,3250 4580.25,3199.75 cw(c4520.5,3140) 4605,3140 4605,3015.36 cw(c4519.64,3015.36) 4580,2955 cw(c4561.46,2973.54) 4561.46,2947.32 4192.74,2947.32 4130.26,2947.32 ccw(c4130.26,2930.74) 4118.54,2942.46 ccw(c4129.98,2931.02) 4113.8,2931.02 4113.8,2922.85 4113.8,2904.2 cw(c4111.91,2904.2) 4113.25,2902.87 cw(c4107.1,2902.87) 4111.44,2898.52 4109.38,2896.46 cw(c4096.99,2908.85) 4096.99,2891.32 4096.93,2891.32 4036.07,2891.32 cw(c4036.07,2909.07) 4023.52,2896.52 cw(c4035.21,2908.21) 4018.68,2908.21 4018.68,2908.26 4018.68,2994.98 cw(c4019.75,2994.98) 4019,2995.74 ccw(c4002.05,2995.74) 4014.03,3007.72 4013.92,3007.83 ccw(c4002.42,2996.34) 4002.42,3012.59 4002.26,3012.59 3959.87,3012.59 ccw(c3959.87,3011.49) 3959.09,3012.27 ccw(c3959.09,2999.25) 3949.88,3008.46 3947.83,3006.4 ccw(c3957.85,2996.39) 3943.68,2996.39 3943.68,2995.74 3943.68,2844.24 cw(c3941.33,2844.24) 3942.99,2842.58 cw(c3919.85,2842.58) 3936.21,2826.21 3930,2820 3903.25,2793.25 ccw(c3914.02,2782.48) 3898.79,2782.48 3898.79,2694.49 ccw(c3905.59,2694.49) 3900.78,2689.69 ccw(c3907.72,2696.63) 3907.72,2686.81 3907.76,2686.81 4054.82,2686.81 ccw(c4054.82,2698.49) 4063.08,2690.23 ccw(c4048.64,2704.68) 4069.06,2704.68 4069.06,2704.76 4069.06,2771.72 cw(c4084.28,2771.72) 4073.52,2782.48 cw(c4085.09,2770.91) 4085.09,2787.27 4086,2787.27
GND on Bottom Layer "Top Layer-No Net" (solid, remove dead copper): 3340,3800 4760,3800 4760,2700 3350,2700 cw(c3350,2710) 3340,2710 3340,3800
5V on Bottom Layer "Top Layer-No Net" (solid, remove dead copper): 4085,2400 4085,2473.58 ccw(c3985,2473.58) 4055.71,2544.29 3700,2900 ccw(c3687.93,2887.93) 3687.93,2905 3640,2905 3637.07,2905 ccw(c3637.07,2887.93) 3625,2900 ccw(c3649.14,2875.86) 3615,2875.86 3615,2875 3615,2836.42 ccw(c3715,2836.42) 3644.29,2765.71 3660,2750 3935.86,2474.14 cw(c3901.72,2440) 3950,2440 3950,2402.07 ccw(c3967.07,2402.07) 3955,2390 ccw(c3967.07,2402.07) 3967.07,2385 3970,2385 4067.93,2385 ccw(c4067.93,2402.07) 4080,2390 4081.46,2391.46 ccw(c4072.93,2400) 4085,2400

## Keep-outs
Keep-Out Layer:
  the board outline again, w10

## Silkscreen, mask and mechanical layers (free items; w line width, h text height)
Top Overlay:
  text "KEY" at 4354,3668 h100
  text "WIFI" at 3718,3377 h200
  text "3.3V" at 4702,2834 h100 r90
  text "5V" at 3575,2802 h100 r90
  text "Relay" at 4245,2799 h100
  text "LAMP" at 4700,2475 h100 r90
  text "N L" at 3546,2464 h200 r90
Bottom Overlay:
  drawing of 1810 lines, arcs and shapes, not listed
  text "TX RX G DN V" at 4564,3680 h100 r90